# EAGLE board AudioMega v101 (EAGLE 6.2)
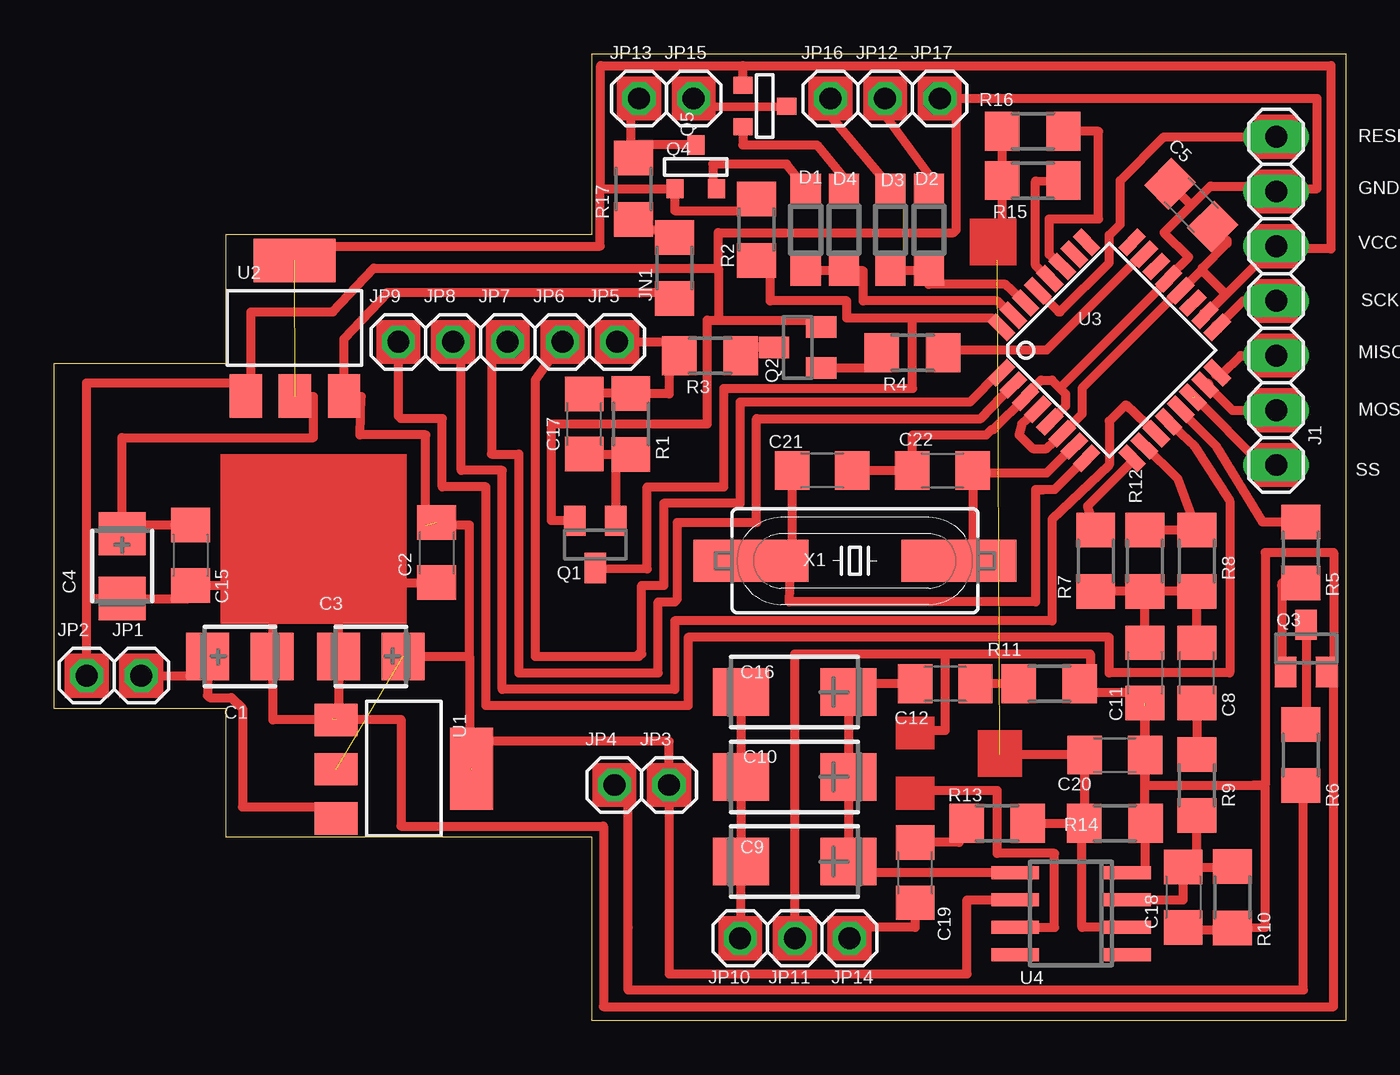
[diagram p0: board, top side]

Size 60 x 44.89 mm. Coordinates in mm from the lower left corner, seen from the top.
Outline: 0,14.51 8,14.51 8,8.51 25,8.51 25,0 60,0 60,44.89 25,44.89 25,36.51 8,36.51 8,30.51 0,30.51 0,14.51
Copper layers (1*16): Top 0.035mm / dielectric 1.5mm / Bottom 0.035mm
Design rules: minimum track width 10mil, minimum drill 24mil, track to track 8mil, track to pad 8mil, pad to pad 8mil, via to via 8mil, smd to smd 8mil, copper to edge 40mil, drill to drill 8mil, minimum pad ring 10mil, minimum via ring 8mil, stop-mask expansion 4mil, vias tented up to drill 0mil, thermal gap 10mil

## Footprints (pad centres in the part's own frame; a part is rotated, then mirrored left to right if it is on the bottom)
CT3528 = smd 2 x 2.2: + 1.5,0; - -1.5,0
C1206 = smd 1.6 x 1.8: 1 -1.4,0; 2 1.4,0
CT6032 = smd 2.6 x 2.2: + 2.5,0; - -2.5,0
SOD123 = smd 1.4 x 1.4: A 1.9,0; C -1.9,0
1X07 = drill 1.016 long: 1 -7.62,0; 2 -5.08,0; 3 -2.54,0; 4 0,0; 5 2.54,0; 6 5.08,0; 7 7.62,0
R1206 = smd 1.6 x 1.803: 1 -1.422,0; 2 1.422,0
1X01 = drill 1.016 octagon: 1 0,0
SOT23 = smd 1 x 1.4: 1 -0.95,-1.1; 2 0.95,-1.1; 3 0,1.1
SOT-23 = smd 0.787 x 0.889: 1 0.025,-1.016; 2 -0.94,1.016; 3 0.991,1.016
SOT223 = smd 1.499 x 2.007: 1 -2.261,-3.15; 2 0.025,-3.15; 3 2.311,-3.15 | smd 3.81 x 2.007: 4 0,3.15
TQFP32-08 = smd 1.27 x 0.559: 1 -4.293,2.8; 2 -4.293,2; 3 -4.293,1.2; 4 -4.293,0.4; 5 -4.293,-0.4; 6 -4.293,-1.2; 7 -4.293,-2; 8 -4.293,-2.8; 17 4.293,-2.8; 18 4.293,-2; 19 4.293,-1.2; 20 4.293,-0.4; 21 4.293,0.4; 22 4.293,1.2; 23 4.293,2; 24 4.293,2.8 | smd 0.559 x 1.27: 9 -2.8,-4.293; 10 -2,-4.293; 11 -1.2,-4.293; 12 -0.4,-4.293; 13 0.4,-4.293; 14 1.2,-4.293; 15 2,-4.293; 16 2.8,-4.293; 25 2.8,4.293; 26 2,4.293; 27 1.2,4.293; 28 0.4,4.293; 29 -0.4,4.293; 30 -1.2,4.293; 31 -2,4.293; 32 -2.8,4.293
SO08 = smd 0.6 x 2.2: 1 -1.905,-2.6; 2 -0.635,-2.6; 3 0.635,-2.6; 4 1.905,-2.6; 5 1.905,2.6; 6 0.635,2.6; 7 -0.635,2.6; 8 -1.905,2.6
HC49UP = smd 5.334 x 1.93: 1 -4.826,0; 2 4.826,0

## Placement (x,y rotation side)
C1  10uF  [CT3528]  8.64,16.91 180 top
C2  100nF  [C1206]  17.78,21.73 270 top
C3  10uF  [CT3528]  14.73,16.91 0 top
C4  10uF  [CT3528]  3.17,21.1 90 top
C5  100nF  [C1206]  52.83,37.86 135 top
C8  100nF  [C1206]  53.09,16.15 90 top
C9  100uF  [CT6032]  34.42,7.38 0 top
C10  100uF  [CT6032]  34.42,11.32 0 top
C11  47nF  [C1206]  50.67,16.15 270 top
C12  47nF  [C1206]  41.4,15.64 180 top
C15  100nF  [C1206]  6.35,21.61 270 top
C16  47uF  [CT6032]  34.42,15.26 0 top
C17  10pF  [C1206]  24.64,27.7 90 top
C18  4n7  [C1206]  52.45,5.73 270 top
C19  100nF  [C1206]  40.01,6.88 90 top
C20  22nF  [C1206]  49.28,12.34 0 top
C21  22pF  [C1206]  35.69,25.54 180 top
C22  22pF  [C1206]  41.27,25.54 0 top
D1  BAT42  [SOD123]  34.92,36.72 90 top
D2  BAT42  [SOD123]  40.64,36.72 270 top
D3  BAT42  [SOD123]  38.86,36.72 270 top
D4  BAT42  [SOD123]  36.7,36.72 90 top
J1  [1X07]  56.77,33.42 90 top
JN1  0  [R1206]  28.83,34.94 270 top
JP1  +Ub  [1X01]  4.06,16.02 0 top
JP2  GND  [1X01]  1.52,16.02 0 top
JP3  BL+ (+5v)  [1X01]  28.57,10.94 0 top
JP4  BL-  [1X01]  26.04,10.94 0 top
JP5  PB7  [1X01]  26.16,31.51 0 top
JP6  D0  [1X01]  23.62,31.51 0 top
JP7  D1  [1X01]  21.08,31.51 0 top
JP8  D2  [1X01]  18.54,31.51 0 top
JP9  D3  [1X01]  16,31.51 0 top
JP10  SP+  [1X01]  31.88,3.83 0 top
JP11  SP-  [1X01]  34.42,3.83 0 top
JP12  PD2  [1X01]  38.61,42.82 0 top
JP13  RXD-TTL5v  [1X01]  27.18,42.82 0 top
JP14  BEEPER  [1X01]  36.96,3.83 0 top
JP15  PD3  [1X01]  29.72,42.82 0 top
JP16  TXD-TTL5v  [1X01]  36.07,42.82 0 top
JP17  GND  [1X01]  41.15,42.82 0 top
Q1  BC846ASMD  [SOT23]  25.15,22.12 180 top
Q2  BC846ASMD  [SOT23]  34.54,31.26 90 top
Q3  BC846ASMD  [SOT23]  58.17,17.29 0 top
Q4  2N7002  [SOT-23]  29.84,39.64 180 top
Q5  2N7002  [SOT-23]  33.02,42.44 90 top
R1  100k  [R1206]  26.8,27.7 90 top
R2  10k  [R1206]  32.64,36.72 270 top
R3  2k2  [R1206]  30.48,30.88 180 top
R4  10k  [R1206]  39.88,31.01 180 top
R5  10k  [R1206]  57.91,21.73 90 top
R6  150  [R1206]  57.91,12.34 90 top
R7  1k  [R1206]  48.39,21.35 90 top
R8  560k  [R1206]  53.09,21.35 90 top
R9  33k  [R1206]  53.09,10.94 90 top
R10  4k7  [R1206]  54.74,5.73 90 top
R11  10  [R1206]  46.23,15.64 180 top
R12  470k  [R1206]  50.67,21.35 90 top
R13  100k  [R1206]  43.81,9.16 0 top
R14  1k  [R1206]  49.28,9.16 180 top
R15  2k2  [R1206]  45.47,39.01 180 top
R16  1k  [R1206]  45.47,41.29 180 top
R17  1k  [R1206]  26.92,38.63 90 top
U1  REG1117-5  [SOT223]  16.26,11.7 270 top
U2  REG1117-3.3  [SOT223]  11.18,32.15 0 top
U3  ATMEGA328-AU  [TQFP32-08]  49.02,31.13 45 top
U4  LM386M  [SO08]  47.24,4.97 90 top
X1  12MHz  [HC49UP]  37.21,21.35 0 top

## Library data of the parts
C1-C5 C8-C12 C15-C22 JN1 R1-R17 = resistor
D1-D4 = diode
J1 JP1-JP17 = pinhead
Q1-Q3 = transistor-npn
Q4 Q5 = zetex; OC_FARNELL: unknown; OC_NEWARK: unknown
U1 U2 = burr-brown; MPN: REG1117; OC_FARNELL: 1097566; OC_NEWARK: 14P6981
U3 = atmel; MPN: ATMEGA8-16AU; OC_FARNELL: 9171371; OC_NEWARK: 73M8863
U4 = linear
X1 = crystal; OC_FARNELL: unknown; OC_NEWARK: unknown

## Nets
+3V3: C4.+ C5.1 C15.1 J1.5 Q4.3 Q5.3 R2.1 U2.2 U2.4 U3.4 U3.6 U3.18 U3.20
+5V: C2.1 C3.+ JN1.2 JP3.1 U1.2 U1.4 U2.3 U4.6
B7: C17.2 JP5.1 R1.2 R3.2
CLK: Q1.3 R2.2 U3.32
GND: C1.- C2.2 C3.- C4.- C5.2 C11.2 C15.2 C18.2 C20.2 C21.1 C22.1 J1.6 JP2.1 JP11.1 JP17.1 Q1.2 Q2.2 Q3.2 R10.1 R11.1 R14.1 U1.1 U2.1 U3.3 U3.5 U3.21 U4.4
N$1: R4.1 U3.23
N$2: D4.A Q5.2
N$3: J1.2 U3.15
N$4: J1.3 U3.16
N$5: J1.4 U3.17
N$6: J1.7 U3.29
N$7: C22.2 U3.7 X1.2
N$8: C21.2 U3.8 X1.1
N$9: Q2.1 R4.2
N$10: R16.1 U3.27
N$11: R15.1 U3.28
N$12: Q2.3 R3.1
N$13: C17.1 Q1.1 R1.1
N$14: U4.7
N$15: C9.- C10.- C16.- JP10.1
N$16: C12.1 R11.2
N$17: C9.+ C10.+ C12.2 C16.+ U4.5
N$18: C18.1 R9.1 R10.2 U4.3
N$19: C19.1 JP14.1
N$20: C19.2 R13.1
N$21: J1.1 U3.14
N$22: JN1.1 R17.1
N$24: C8.1 R9.2
N$25: C8.2 C11.1 R7.1 R8.1 R12.1
N$26: Q3.3 R6.2
N$27: R7.2 U3.9
N$28: R8.2 R12.2 U3.10
N$29: JP4.1 R6.1
N$30: JP9.1 U3.12
N$31: JP8.1 U3.11
N$32: C1.+ JP1.1 U1.3
N$33: Q3.1 R5.1
N$34: R5.2 U3.13
N$35: JP7.1 U3.2
N$36: JP6.1 U3.1
N$37: D3.C JP16.1
N$38: JP15.1 Q5.1
N$39: D2.C JP12.1
N$41: JP13.1 Q4.1 R17.2
N$42: D2.A D3.A U3.30
N$45: D1.A Q4.2
N$46: D1.C D4.C U3.31
VOL_B: C20.1 R13.2 R14.2 R15.2 R16.2 U4.2

## Tracks (layer width: path | path; a pad name or v marks a point on that pad's centre or on a via)
+3V3  (1 unrouted)
  Top 0.406: 56.68,35.96 U3.18 | 53.47,32.79 54.48,33.8 54.36,33.8 53.34,34.82 | 53.34,34.82 53.27,34.82 U3.20 52.28,33.89 47.75,29.36 47.75,28.17 U3.6 46.1,26.56 45.47,26.56 44.83,27.2 44.96,27.7 U3.4 | C15.1 3.58,23.01 C4.+ 3.17,27.07 12.06,27.07 12.06,28.97 U2.2 | U2.4 11.94,35.96 25.38,35.96 25.38,38.6 25.4,38.63 | J1.5 56.77,35.83 59.31,35.83 59.31,44.34 32,44.34 | 53.34,34.82 53.34,34.94 54.48,36.09 54.48,36.21 C5.1 | 25.4,38.63 25.4,44.34 32,44.34 | 25.4,38.63 Q4.3 28.83,38.5 28.83,37.61 33.02,37.61 R2.1 | Q5.3 32,44.34
  Top 0.61: J1.5 56.68,35.96 | U3.18 53.47,32.79
+5V  (3 unrouted)
  Top 0.406: 19.41,11.68 19.43,11.7 | C3.+ 19.3,16.91 | 19.3,16.91 19.3,23 17.27,23 17.27,27.2 14.22,27.2 14.28,28.97 U2.3 13.46,29.74 13.46,31.64 15.49,33.8 28.57,33.8 28.57,33.16 JN1.2 | U4.6 42.42,5.61 42.42,2.18 28.57,2.18 JP3.1 28.57,12.97 19.3,12.97 | 19.3,16.91 19.3,12.97 | 19.3,12.97 19.3,10.56 19.41,10.56 U1.4
B7
  Top 0.406: C17.2 24.64,29.13 R1.2 26.8,29.1 28.57,29.1 28.57,31.26 R3.2 28.57,31.51 JP5.1
CLK
  Top 0.406: 39.88,32.63 36.83,32.63 36.83,33.42 33.27,33.42 33.27,34.69 32.64,34.69 R2.2 | 39.88,32.63 43.56,32.63 U3.32 | Q1.3 27.56,20.97 27.56,24.78 31.11,24.78 31.11,29.36 39.88,29.36 39.88,32.63
GND  (2 unrouted)
  Top 0.406: JP2.1 1.52,19.58 | 1.52,19.58 1.52,29.61 9.14,29.61 | 9.14,29.61 U2.1 | 1.52,19.58 1.55,19.6 C4.- 6.25,19.6 6.35,19.7 C15.2 9.01,20.21 9.02,20.21 9.02,19.58 10.16,19.58 10.16,16.93 C1.- 10.19,16.86 10.19,13.96 U1.1 13.23,14.09 C3.- 13.23,19.55 13.21,19.58 14.22,19.58 14.99,20.34 C2.2 | 41.66,42.69 41.91,42.82 | 41.91,42.82 58.67,42.82 58.67,38.63 56.77,38.63 J1.6 56.52,38.75 53.72,38.75 52.83,37.86 | 9.14,29.61 9.14,32.91 12.95,32.91 14.86,34.94 30.86,34.94 | JP11.1 34.42,17.04 41.27,17.04 | C20.2 C11.2 50.67,15.26 48.13,15.26 | 41.27,17.04 48.13,17.04 48.13,15.26 | 50.67,14.62 50.67,11.45 | 50.67,11.45 50.67,10.94 55.75,10.94 | 55.75,10.94 56.26,10.94 | 56.26,10.94 56.26,4.34 R10.1 54.61,4.31 54.61,4.21 52.45,4.21 C18.2 | C21.1 C22.1 39.88,26.94 39.88,27.2 43.31,27.2 43.56,27.45 43.64,27.45 U3.3 45.14,29.03 45.85,29.74 46.35,29.74 46.74,29.36 | 46.74,29.36 46.99,29.1 46.99,28.54 U3.5 | 46.74,29.36 51.77,34.39 U3.21 51.77,34.52 52.7,35.45 51.56,36.59 52.83,37.86 | 56.26,10.94 56.26,21.73 59.44,21.73 59.44,16.64 | 56.26,10.94 55.75,10.94 | 59.44,16.64 Q3.2 | 12.95,13.99 16.13,13.99 16.13,9.04 25.53,9.04 25.53,0.65 59.44,0.65 59.44,16.64 | 40.01,13.48 41.4,13.48 41.4,16.91 41.27,17.04 | 48.13,15.26 48.03,15.26 R11.1 | Q1.2 23.11,23.22 23.11,27.7 30.35,27.7 30.35,32.53 30.86,32.53 | 52.83,37.86 C5.2 | 52.83,37.86 | 41.91,42.82 41.91,36.72 41.78,36.59 30.86,36.59 30.86,34.94 | JP17.1 41.91,42.82 | 30.86,32.53 34.92,32.53 Q2.2 | 30.86,34.94 30.86,32.53 | U4.4 50.7,6.88 R14.1 50.67,9.16 50.67,11.45
  Top 0.61: J1.6 55.82,38.5
N$1
  Top 0.406: U3.23 50.55,35.58 46.1,31.13 41.3,31.13 R4.1
N$2
  Top 0.406: Q5.2 32,40.66 35.43,40.66 36.7,39.13 D4.A
N$3
  Top 0.406: 53.56,29.51 54.74,28.34 J1.2
  Top 0.61: U3.15 53.56,29.51
N$4
  Top 0.406: 54.23,29.99 55.12,30.88 J1.3 | 54.1,29.99 54.36,29.74 54.1,29.99
  Top 0.61: U3.16 54.04,30.05 54.1,29.99 54.23,29.99
N$5
  Top 0.406: 54.04,32.21 55.24,33.42 J1.4
  Top 0.61: U3.17 54.04,32.21
N$6
  Top 0.406: 56.01,41.04 J1.7 51.56,41.04 49.53,39.01 49.53,38.75 49.53,36.97 49.4,36.85 49.02,36.47 49.02,35.2 46.74,32.91 46.68,32.91 U3.29
N$7
  Top 0.406: U3.7 47.37,26.68 46.1,25.42 44.96,25.42 42.8,25.42 C22.2 42.67,21.99 X1.2 43.43,21.35 43.81,21.48
N$8
  Top 0.406: U3.8 47.94,26.12 46.48,24.66 45.97,24.66 | 45.97,24.66 45.59,24.66 | 45.59,24.66 45.97,24.66 | 45.97,24.66 45.59,24.66 | 45.59,24.66 45.59,22.88 45.59,22.24 45.59,19.45 34.16,19.45 34.23,21.4 | 34.23,21.4 X1.1 | C21.2 34.29,21.46 34.23,21.4
N$9
  Top 0.406: Q2.1 38.52,30.31 R4.2
N$10
  Top 0.406: U3.27 46.79,35.02 46.23,35.58 46.23,37.23 48.51,37.23 48.51,41.29 R16.1
N$11
  Top 0.406: U3.28 46.21,34.45 45.59,35.07 45.59,38.98 R15.1
N$12
  Top 0.406: Q2.3 33.4,31.26 32.13,31.26 31.65,31.18 R3.1
N$13
  Top 0.406: Q1.1 26.1,26.3 C17.1 26.8,26.3 R1.1
N$14
  Top 0.406: U4.7 46.48,4.34 46.48,7.77 43.81,7.77 43.81,10.69 40.01,10.69
N$15
  Top 0.406: C16.- C10.- C9.- JP10.1
N$16
  Top 0.406: R11.2 C12.1
N$17
  Top 0.406: 36.92,8.02 C10.+ C16.+ 36.92,15.64 C12.2 | 36.92,8.02 C9.+ | U4.5 36.92,6.88 36.92,8.02
N$18
  Top 0.406: U4.3 52.45,5.61 C18.1 | C18.1 54.74,7.13 R10.2 | C18.1 52.7,7.13 52.7,7.51 53.09,7.51 53.09,7.38 R9.1
N$19
  Top 0.406: C19.1 40.01,5.61 40.01,4.34 36.96,4.34 JP14.1
N$20
  Top 0.406: R13.1 42.04,9.16 42.04,8.27 C19.2
N$21  (1 unrouted)
  Top 0.406: 52.96,28.97 56.13,25.8 J1.1
N$22
  Top 0.406: R17.1 26.92,36.72 28.45,36.72 JN1.1
N$24
  Top 0.406: C8.1 R9.2
N$25
  Top 0.406: R12.1 R8.1 C8.2 | R12.1 R7.1 | C11.1 R12.1
N$26
  Top 0.406: Q3.3 58.17,13.86 58.06,13.76 R6.2
N$27
  Top 0.406: U3.9 50.04,26.05 50.16,26.05 48.01,23.89 R7.2
N$28
  Top 0.406: U3.10 52.2,25.16 R8.2 | R8.2 53.09,22.62 R8.2 | R8.2 R12.2
N$29
  Top 0.406: R6.1 58.27,10.79 58.32,10.79 58.04,10.51 58.04,1.41 26.67,1.41 26.67,4.34 26.67,10.56 26.29,10.94 JP4.1
N$30
  Top 0.406: U3.12 52.96,26.69 54.61,24.15 54.61,16.15 49.02,16.15 49.02,17.8 29.46,17.8 29.46,14.62 20.07,14.62 20.07,24.78 18.03,24.78 18.03,27.96 16.13,27.96 16,28.08 JP9.1
N$31
  Top 0.406: U3.11 49.78,28.59 49.02,27.83 49.02,25.8 46.35,23.26 46.35,18.56 28.83,18.56 28.83,15.38 20.83,15.38 20.83,25.54 18.92,25.54 18.92,30.88 JP8.1
N$32
  Top 0.406: U1.3 12.7,9.92 8.76,9.92 8.76,14.5 8.26,15 7.24,15 7.14,15.11 C1.+ 6.88,16.12 6.99,16.02 JP1.1
N$33
  Top 0.406: R5.1 57.05,20.31 57.02,20.21 57.02,16.64 Q3.1
N$34
  Top 0.406: U3.13 52.34,28.32 53.98,26.69 56.13,23.16 R5.2
N$35
  Top 0.406: U3.2 44.03,28.97 43.05,27.96 32.64,27.96 32.64,23.13 28.96,23.13 28.96,19.58 28.83,19.45 28.07,19.45 28.07,16.15 21.59,16.15 21.59,26.31 20.32,26.31 20.32,30.75 JP7.1
N$36
  Top 0.406: U3.1 43.9,30.08 42.55,28.72 31.88,28.72 31.88,24.02 28.32,24.02 28.32,20.21 27.3,20.21 27.3,17.04 27.18,17.04 27.18,16.91 22.35,16.91 22.35,29.74 JP6.1
N$37
  Top 0.406: D3.C 38.48,39.13 35.94,42.18 36.07,42.69 JP16.1
N$38
  Top 0.406: JP15.1 29.84,42.44 Q5.1
N$39
  Top 0.406: D2.C 40.77,39.13 38.23,42.56 38.61,42.56 JP12.1
N$41
  Top 0.406: R17.2 26.8,40.66 | 26.8,40.66 26.8,42.82 JP13.1 | Q4.1 26.8,40.66
N$42
  Top 0.406: U3.30 44.2,34.18 40.64,34.18 D2.A D3.A
N$45
  Top 0.406: D1.A 34.04,39.77 30.61,39.77 30.61,38.63 Q4.2
N$46
  Top 0.406: U3.31 44.48,32.75 43.81,33.42 37.59,33.42 37.59,34.82 D4.C D1.C
VOL_B  (1 unrouted)
  Top 0.406: R15.2 R16.2 44.04,35.48 43.81,35.32 | U4.2 47.75,4.34 47.75,9.04 47.85,9.04 R14.2 | R13.2 R14.2 | 43.94,12.34 C20.1 47.88,9.16 R14.2
(copper drawn outside any net)
  shapes: Top area x29, Top circle x2

## Text on the board
tNames: RESET | GND | VCC (3.3v) | SCK | MISO | MOSI | SS